# Altium PCB JTAGtoSWD.PcbDoc
Units mm, origin at the board's own origin, x right, y up, seen from the top; angles counter-clockwise.
Board outline 27.5 x 33.5 mm, 2 copper layers (Top Layer, Bottom Layer); 3 components, 0 nets, 44 pads, 0 vias.
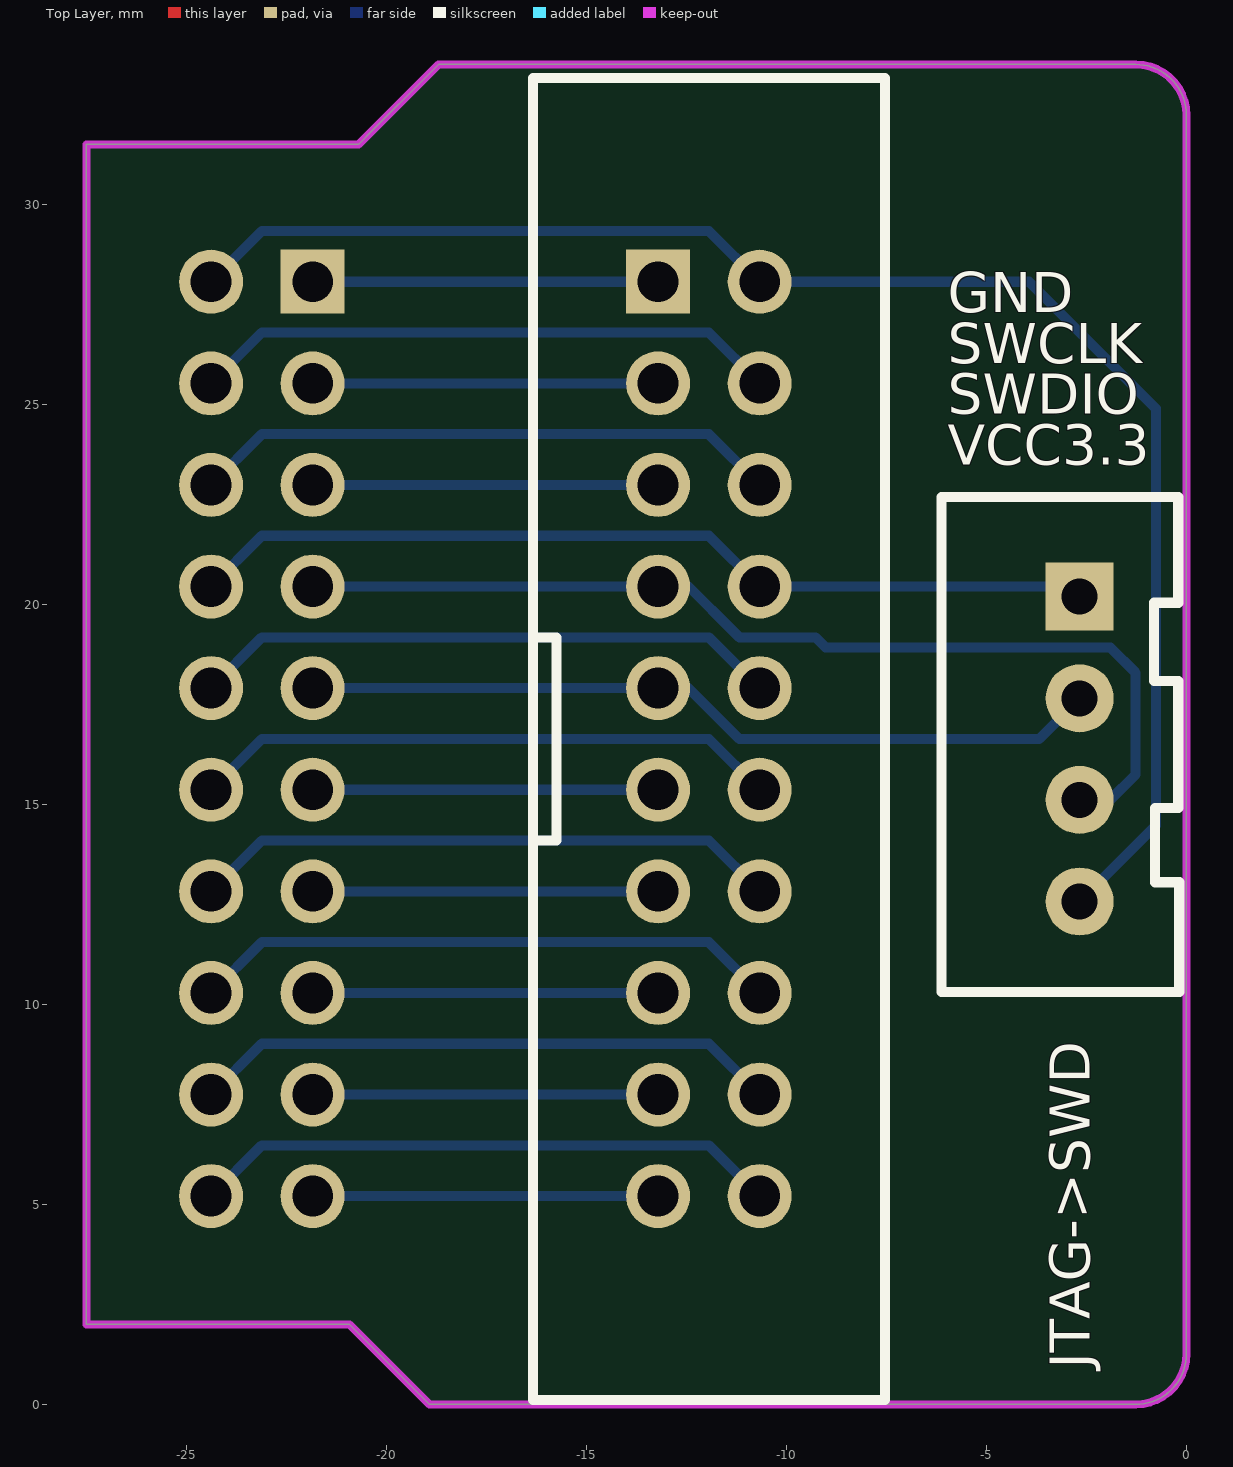
[diagram p0: Top Layer view]
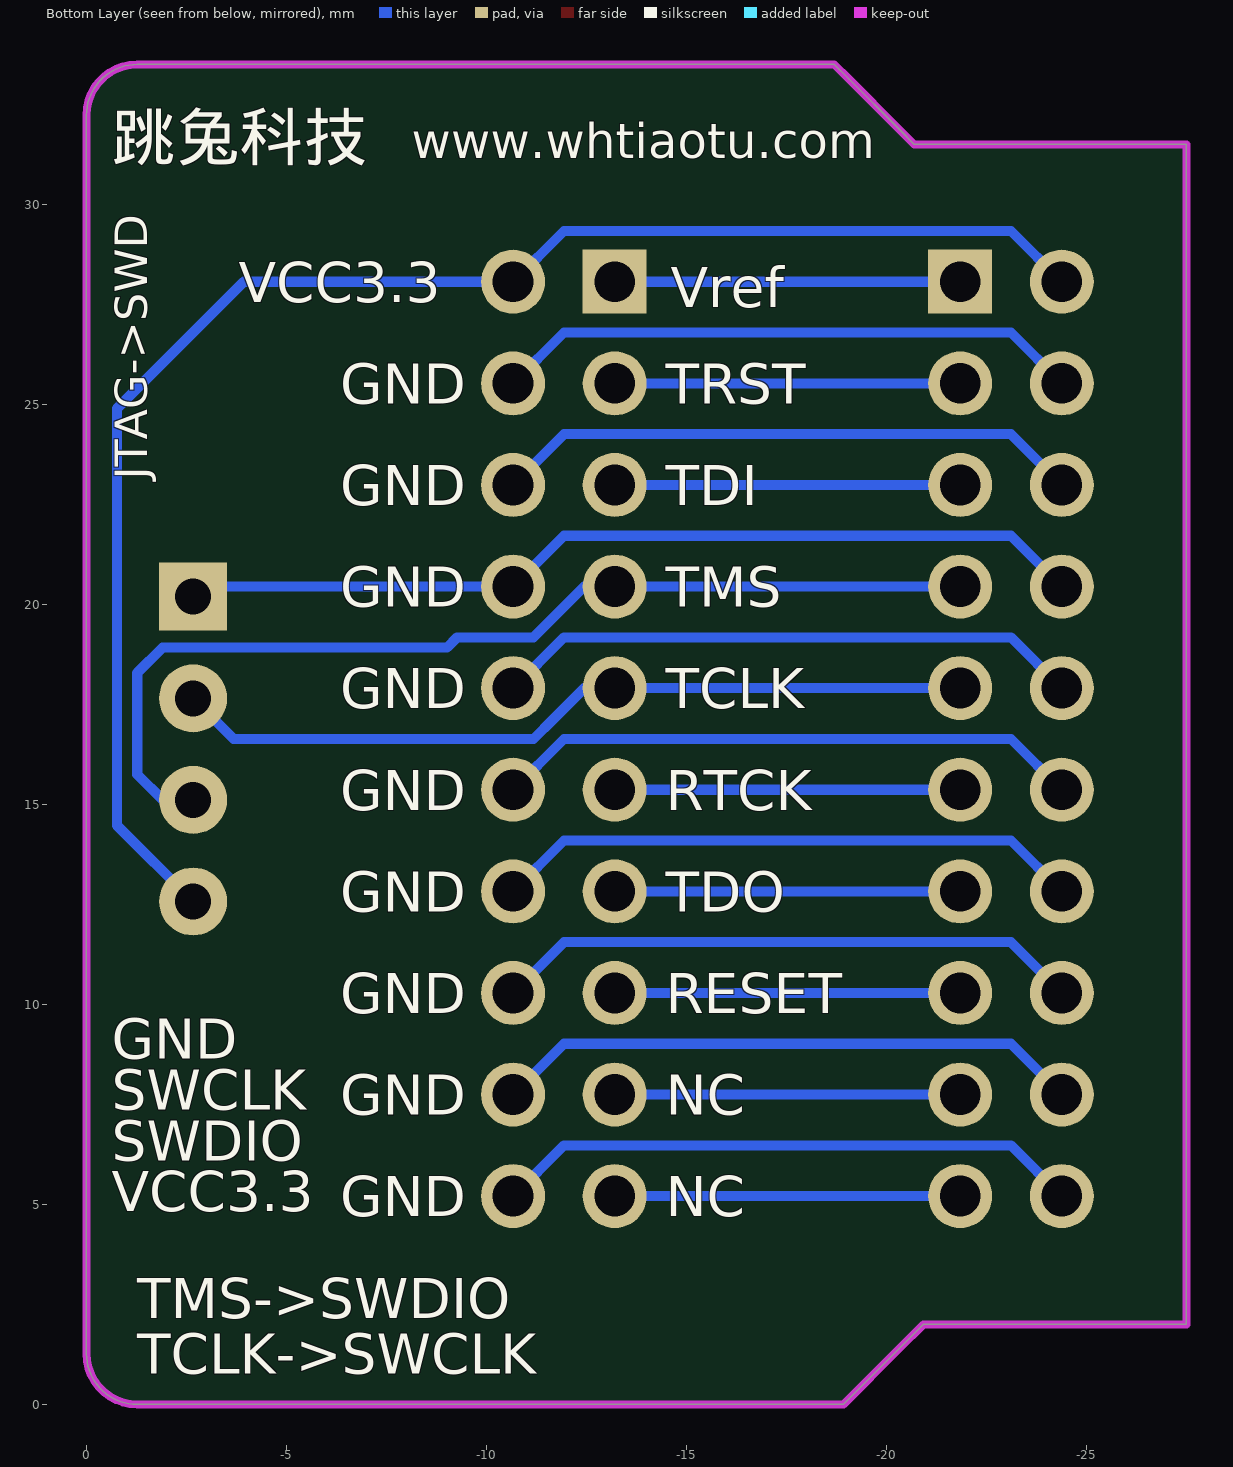
[diagram p1: Bottom Layer view, seen from below]

## Layer stack, top to bottom
Top Solder: solder mask 0.0102, Solder Resist, Dk 3.5
Top Layer: signal copper 0.0356
Dielectric 1: dielectric 0.32, FR-4, Dk 4.8
Bottom Layer: signal copper 0.0356
Bottom Solder: solder mask 0.0102, Solder Resist, Dk 3.5

## Board outline
-27.5,2 -20.923,2 -20.32,1.397 -18.923,0 -1.27,0 ccw(c-1.27,1.27) 0,1.27 0,32.23 ccw(c-1.27,32.23) -1.27,33.5 -18.697,33.5 -19.05,33.147 -20.32,31.877 -20.697,31.5 -27.5,31.5

## Design rules (kind name [scope] priority, off if disabled: settings)
Clearance [All] p1: gap=0.254 ignorepadtopadclearanceinfootprint=FALSE except(0: Arc-Hole Track-Hole SMDPad-Hole THPad-Hole Via-Hole Fill-Hole Poly-Hole Region-Hole Text-Hole)
PolygonConnect [All] p1: connectstyle=Relief reliefconductorwidth=0.254 reliefentries=4 polygonreliefangle="90 Angle" airgapwidth=0.254
RoutingVias [All] p1: holewidth=0.711 width=1.27 viastyle="Through Hole" minholewidth=0.711 minwidth=1.27 maxholewidth=0.711 maxwidth=1.27
SolderMaskExpansion [All] p1: expansion=0.102
Width [All] p1: maxlimit=0.254 minlimit=0.254 preferedwidth=0.254
30 further rules are at their usual default settings.

## Components (designator, comment, footprint, x,y, rotation, side; value= is the part's Value field where it differs from the comment)
? "Comment" DC-2.54-L-Z-20P -23.114,16.637 r270 bottom locked
? "Comment" XH2.54-LI-4P -2.667,16.383 r270 top locked
? "Comment" DC-2.54-L-Z-20P -11.938,16.637 r270 top locked

## Footprints (in the part's own frame and the unit in brackets; to place one, negate y for a bottom-side part, rotate by r counter-clockwise, add the part's x,y. Pads: shape width x height; smd on the part's side, far side on the other; paste and mask are expansions set on the pad)
DC-2.54-L-Z-20P [mm]
  rect 1.6x1.6 hole 1.02: 1(-11.43,-1.27)
  round 1.6 hole 1.02: 2(-11.43,1.27) 3(-8.89,-1.27) 4(-8.89,1.27) 5(-6.35,-1.27) 6(-6.35,1.27) 7(-3.81,-1.27) 8(-3.81,1.27) 9(-1.27,-1.27) 10(-1.27,1.27) 11(1.27,-1.27) 12(1.27,1.27) 13(3.81,-1.27) 14(3.81,1.27) 15(6.35,-1.27) 16(6.35,1.27) 17(8.89,-1.27) 18(8.89,1.27) 19(11.43,-1.27) 20(11.43,1.27)
XH2.54-LI-4P [mm]
  rect 1.7x1.7 hole 0.9: 1(-3.81,0)
  round 1.7 hole 0.9: 2(-1.27,0) 3(1.27,0) 4(3.81,0)
  silkscreen extent -6.3,-3.45 6.07,2.49, body extent -6.31,-3.3 6.31,2.4, height 7.03

## Nets (pads, with @x,y where several pads share a name; then routed paths per layer and width w, separated by ;. In a path a pad name is that pad's centre, name@x,y a point inside that pad or via, vN(x,y) a via of type N, cw(c..) or ccw(c..) an arc to the next point about the centre after c; other vN are vias at no path point)
pads on no net: ?.1 ?.2 ?.3 ?.4 ?.5 ?.6 ?.7 ?.8 ?.9 ?.10 ?.11 ?.12 ?.13 ?.14 ?.15 ?.16 ?.17 ?.18 ?.19 ?.20
copper on no net: | length 296
  Bottom Layer w0.254: -24.384,5.207 -23.114,6.477 -11.938,6.477 -10.668,5.207 ; -24.384,7.747 -23.114,9.017 -11.938,9.017 -10.668,7.747 ; -24.384,10.287 -23.114,11.557 -11.938,11.557 -10.668,10.287 ; -24.384,12.827 -23.114,14.097 -11.938,14.097 -10.668,12.827 -10.414,12.573 ; -24.384,15.367 -23.114,16.637 -11.938,16.637 -10.668,15.367 ; -24.384,17.907 -23.114,19.177 -11.938,19.177 -10.668,17.907 ; -24.384,20.447 -23.114,21.717 -11.938,21.717 -10.668,20.447 -2.921,20.447 -2.667,20.193 ; -24.384,22.987 -23.114,24.257 -11.938,24.257 -10.668,22.987 ; -24.384,25.527 -23.114,26.797 -11.938,26.797 -10.668,25.527 ; -24.384,28.067 -23.114,29.337 -21.463,29.337 -11.938,29.337 -10.668,28.067 -3.937,28.067 -0.762,24.892 -0.762,14.478 -2.667,12.573 ; -21.844,5.207 -13.208,5.207 ; -21.844,7.747 -13.208,7.747 ; -21.844,10.287 -13.208,10.287 ; -21.844,12.827 -13.208,12.827 ; -21.844,15.367 -13.208,15.367 ; -21.844,17.907 -13.208,17.907 -12.446,17.907 -11.684,17.145 -11.176,16.637 -9.652,16.637 -9.271,16.637 -3.683,16.637 -2.667,17.653 -3.302,17.653 ; -21.844,20.447 -13.208,20.447 -12.446,20.447 -11.303,19.304 -11.176,19.177 -9.271,19.177 -9.017,18.923 -4.953,18.923 -1.905,18.923 -1.27,18.288 -1.27,15.748 -1.905,15.113 -2.667,15.113 ; -21.844,22.987 -13.208,22.987 ; -21.844,25.527 -13.208,25.527 ; -21.844,28.067 -13.208,28.067

## Keep-outs
Keep-Out Layer:
  the board outline again, w0.203

## Silkscreen, mask and mechanical layers (free items; w line width, h text height)
Top Overlay:
  text "GND" at -5.969,27.305 h1
  text "SWCLK" at -5.969,26.035 h1
  text "SWDIO" at -5.969,24.765 h1
  text "VCC3.3" at -5.969,23.495 h1
  text "JTAG->SWD" at -2.413,0.889 h1 r90
Bottom Overlay:
  text "www.whtiaotu.com" at -8.128,30.861 h1.5
  text "跳兔科技" at -0.635,30.734 h2
  text "VCC3.3" at -3.81,27.559 h1
  text "Vref" at -14.605,27.432 h1
  text "TRST" at -14.478,25.019 h1
  text "GND" at -6.35,25.019 h1
  text "JTAG->SWD" at -1.524,23.114 h0.81 r270
  text "TDI" at -14.478,22.479 h1
  text "GND" at -6.35,22.479 h1
  text "TMS" at -14.478,19.939 h1
  text "GND" at -6.35,19.939 h1
  text "TCLK" at -14.478,17.399 h1
  text "GND" at -6.35,17.399 h1
  text "RTCK" at -14.478,14.859 h1
  text "GND" at -6.35,14.859 h1
  text "TDO" at -14.478,12.319 h1
  text "GND" at -6.35,12.319 h1
  text "RESET" at -14.478,9.779 h1
  text "GND" at -6.35,9.779 h1
  text "GND" at -0.635,8.636 h1
  text "SWCLK" at -0.635,7.366 h1
  text "NC" at -14.478,7.239 h1
  text "GND" at -6.35,7.239 h1
  text "SWDIO" at -0.635,6.096 h1
  text "VCC3.3" at -0.635,4.826 h1
  text "NC" at -14.478,4.699 h1
  text "GND" at -6.35,4.699 h1
  text "TMS->SWDIO" at -1.27,2.159 h1
  text "TCLK->SWCLK" at -1.27,0.762 h1